# Altium PCB I3_PFE_FULLFILL_SATTLER_RASP_2.PCBDOC
Units mm, origin at the board's own origin, x right, y up, seen from the top; angles counter-clockwise.
Board outline 41.85 x 56.55 mm, 2 copper layers (TopLayer, BottomLayer); 8 components, 6 nets, 84 pads, 11 vias.
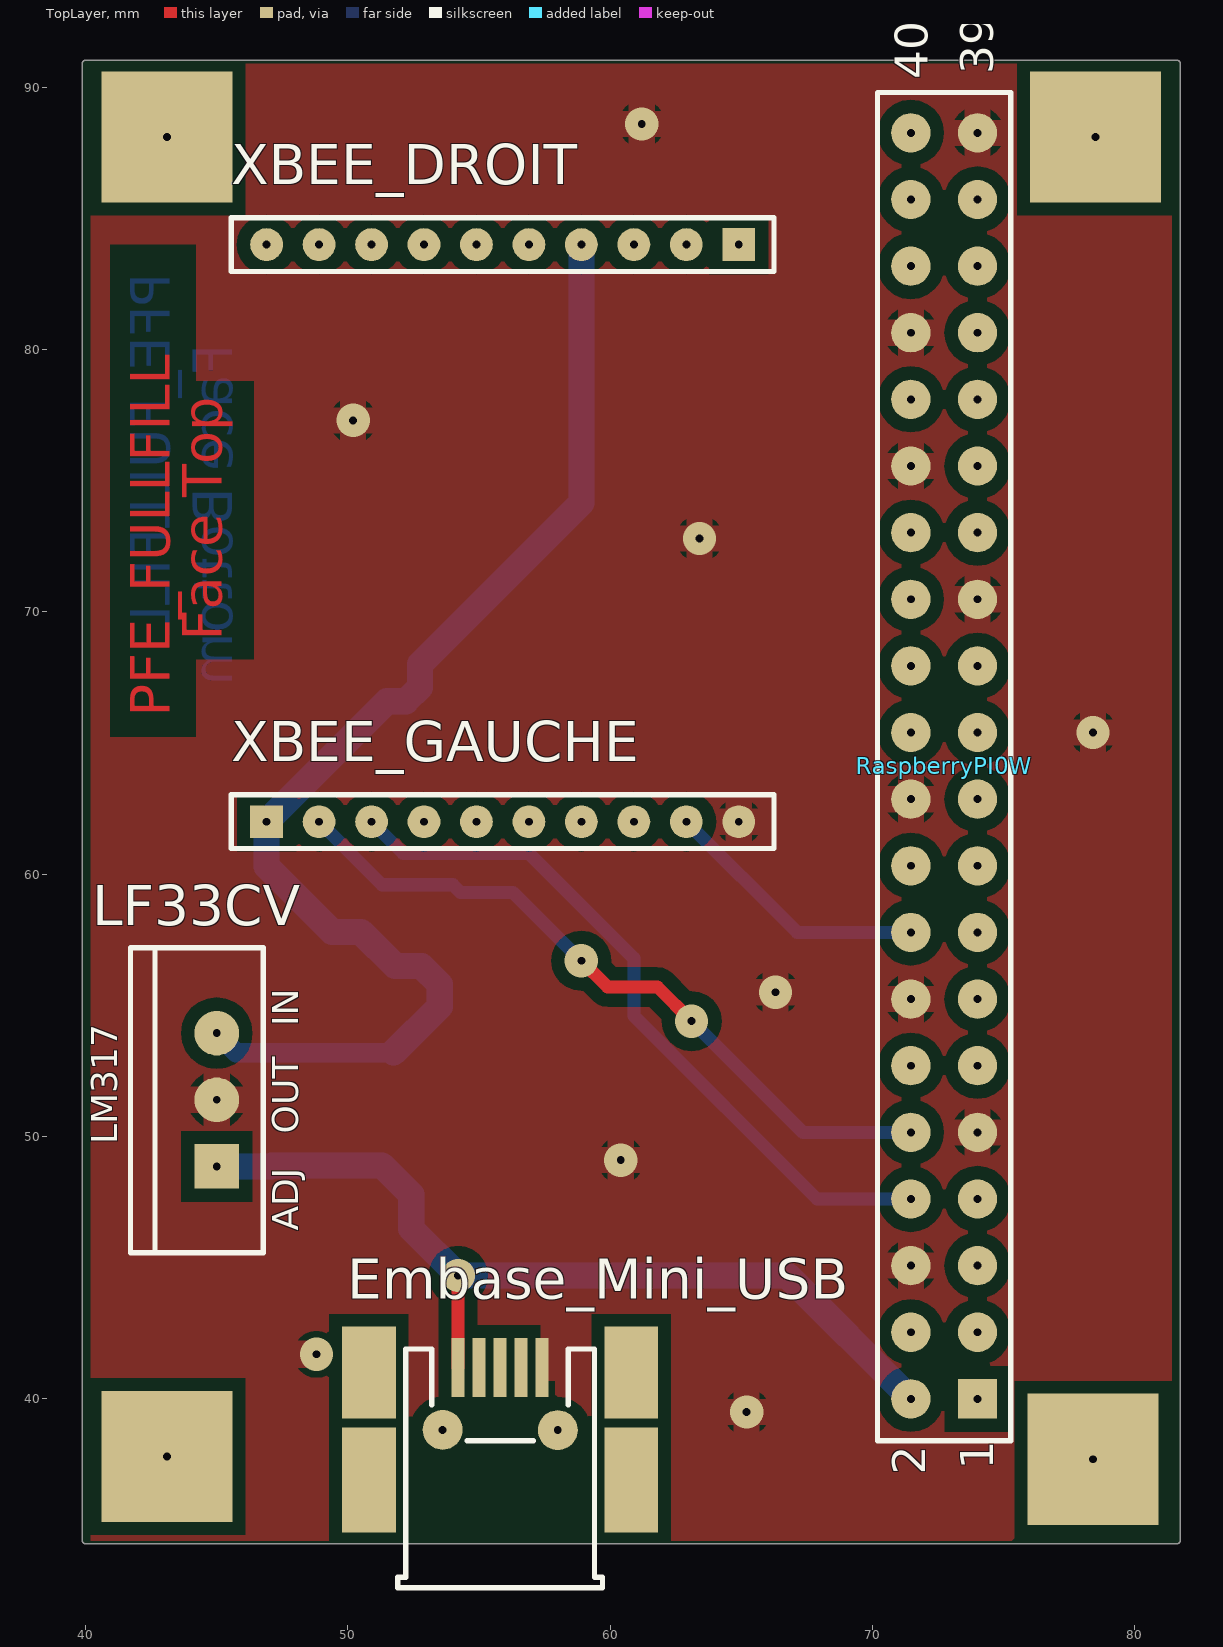
[diagram p0: TopLayer view]
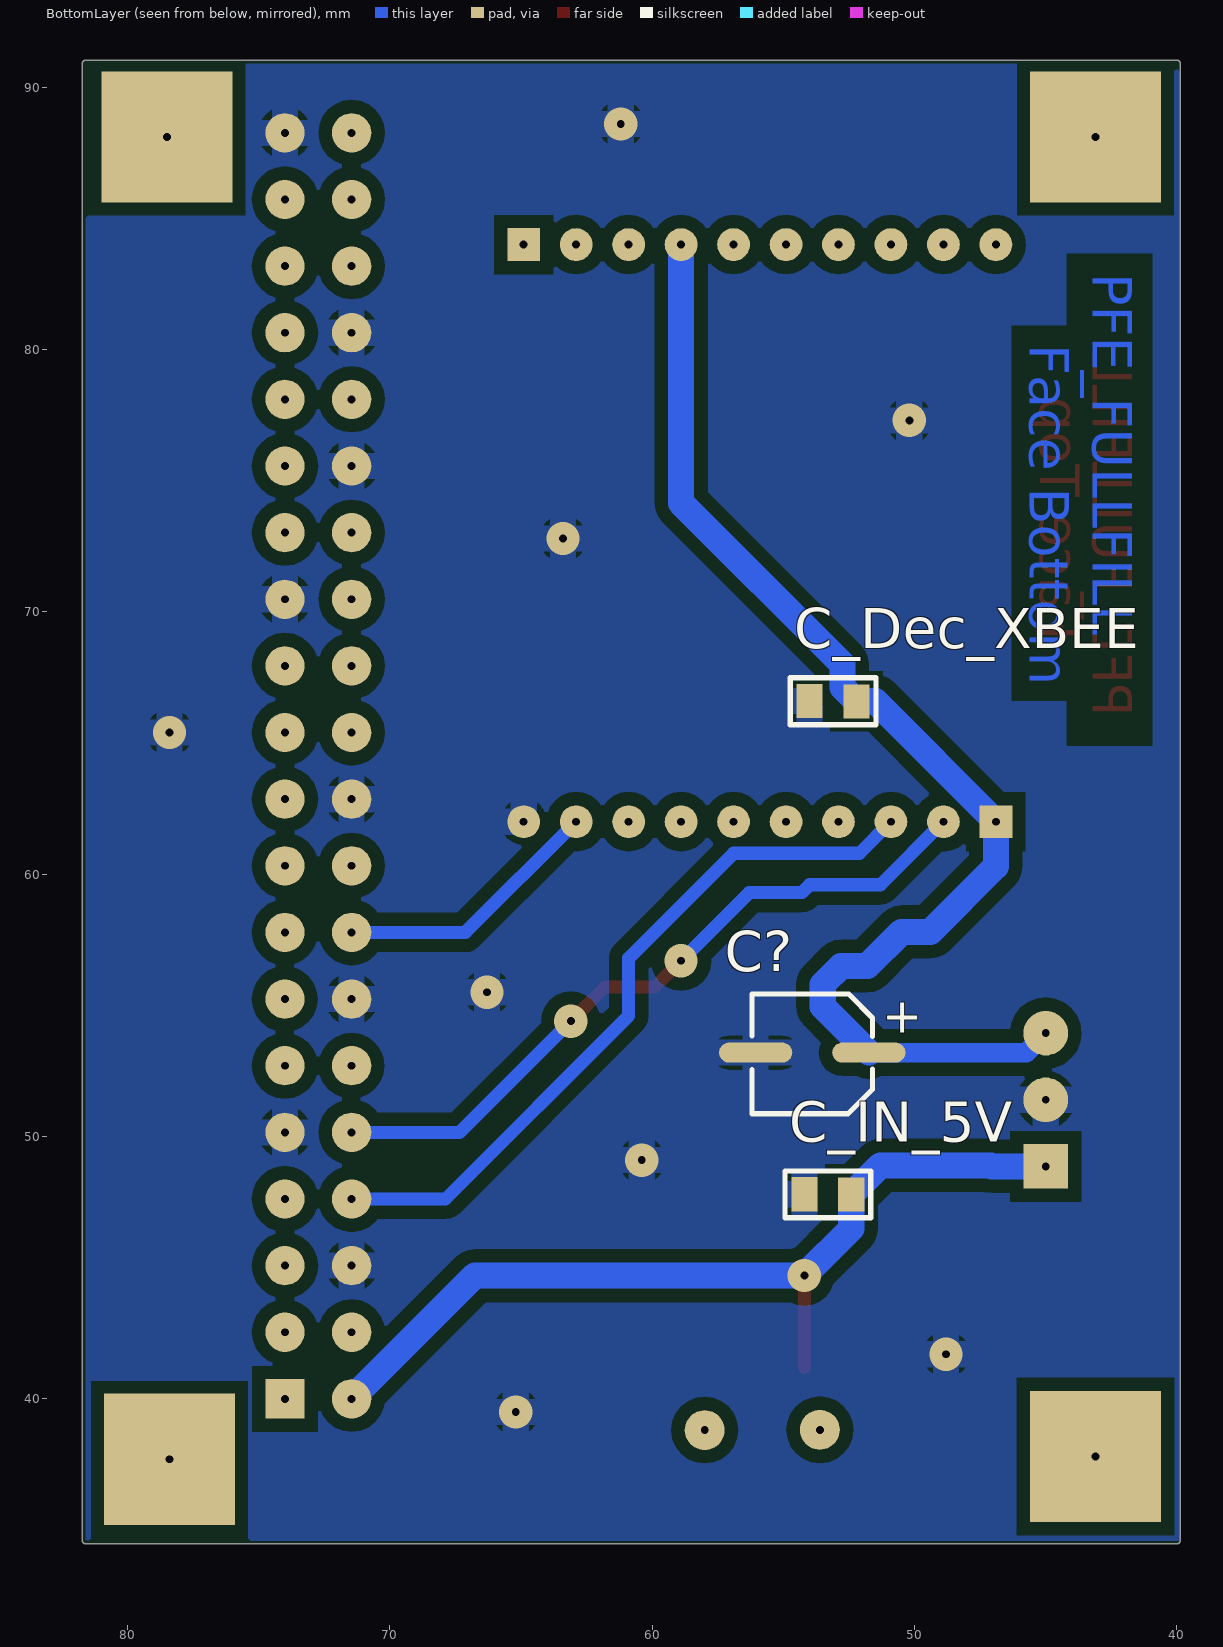
[diagram p1: BottomLayer view, seen from below]
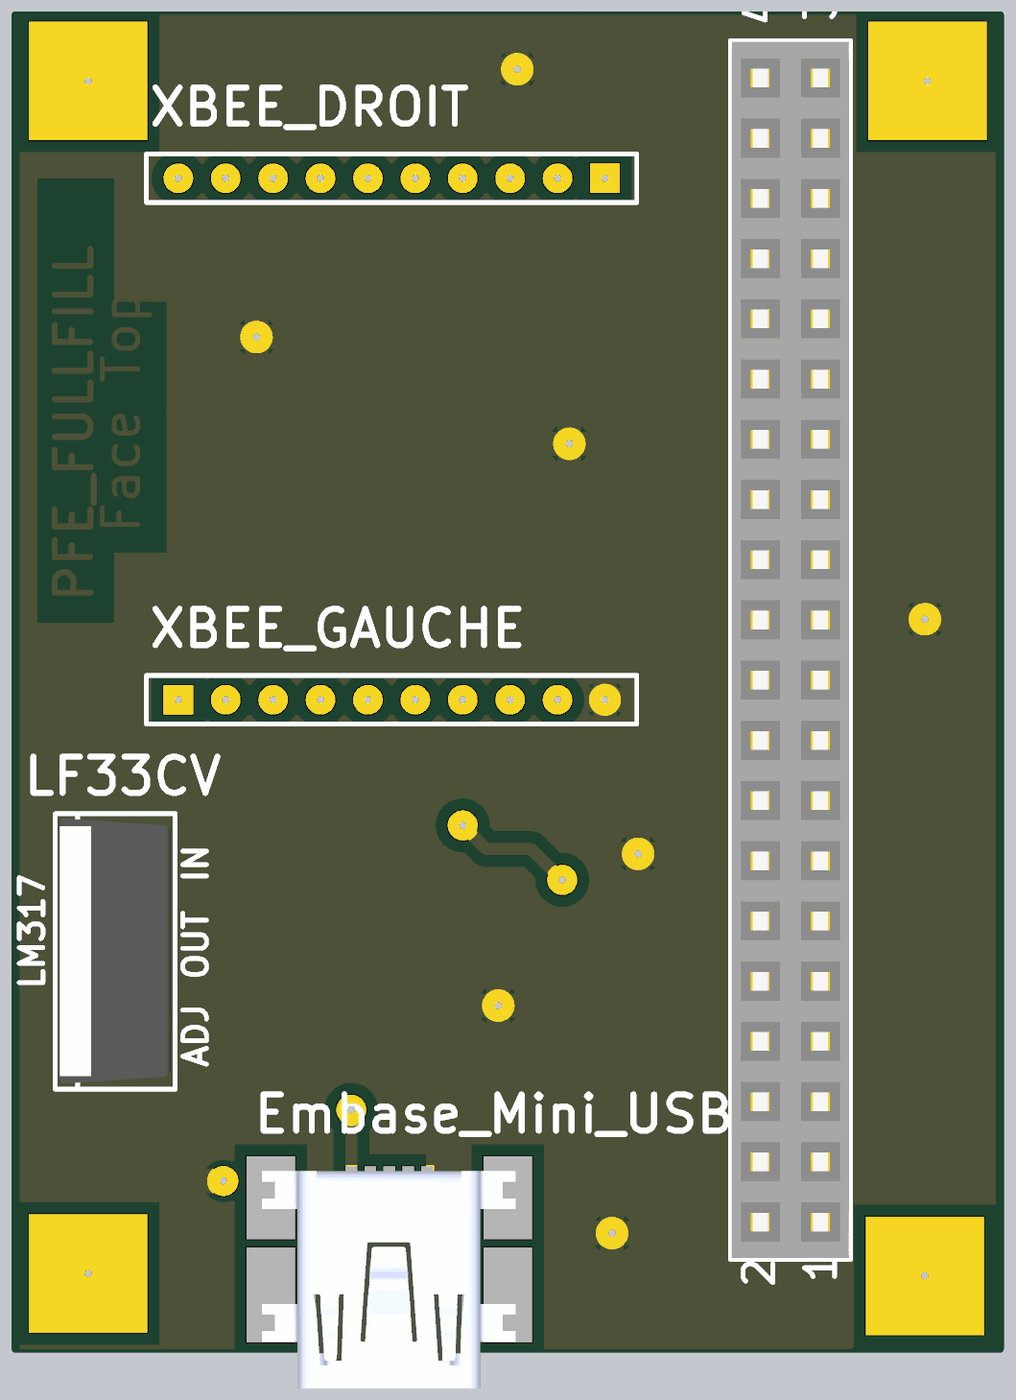
[diagram p2: 3D render of the assembled board from above, using the file's embedded part models]
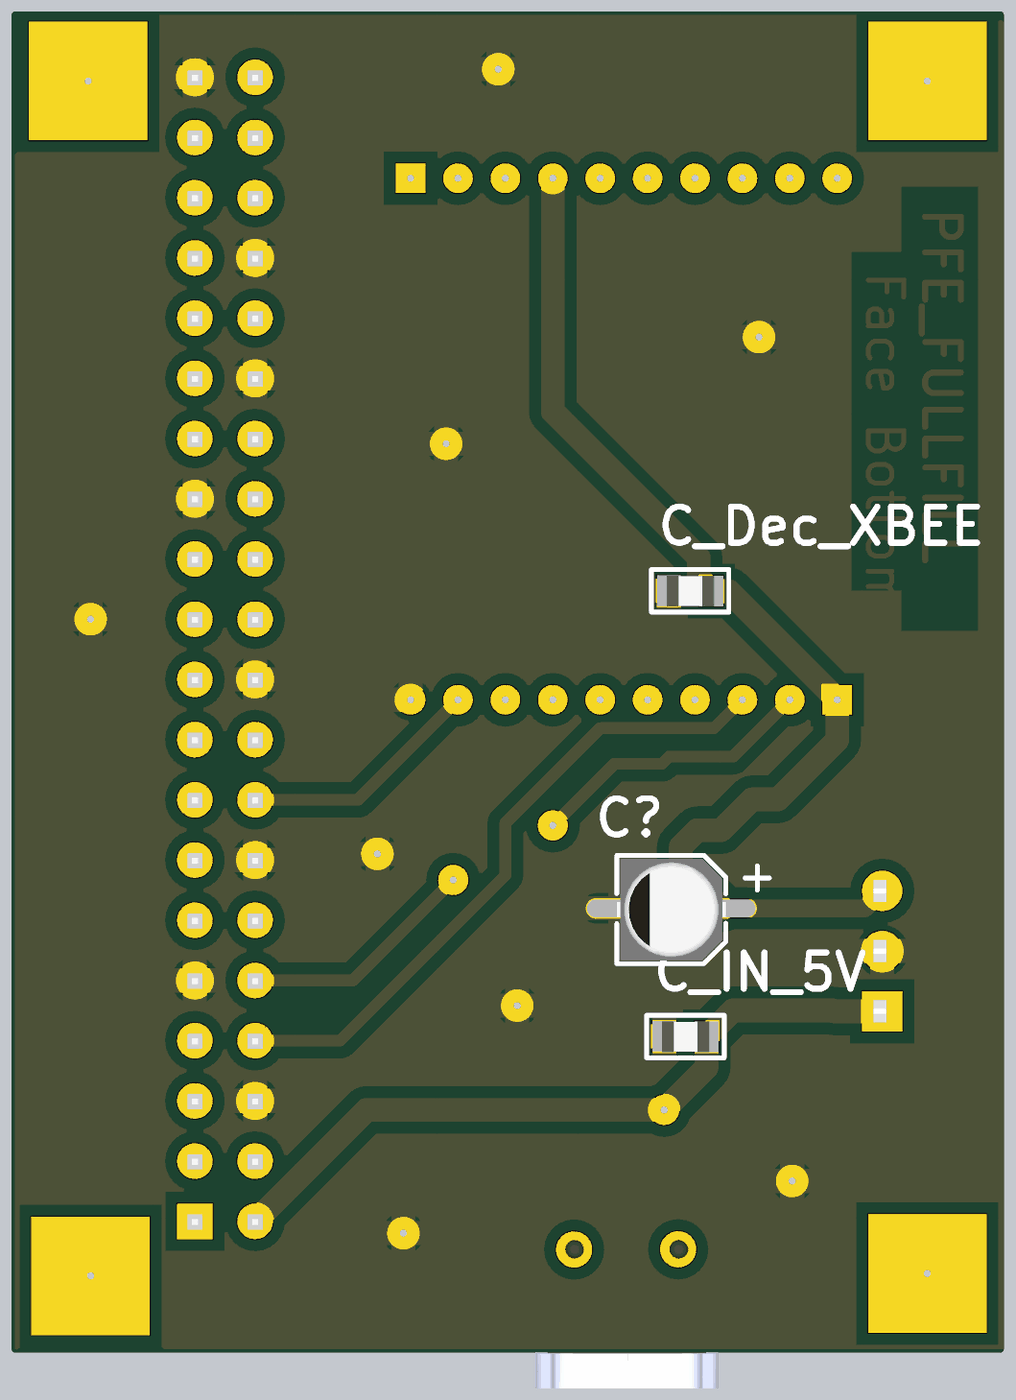
[diagram p3: 3D render of the assembled board from below, using the file's embedded part models]

## Layer stack, top to bottom
TopSolder: solder mask 0.0102, Solder Resist, Dk 3.5
TopLayer: signal copper 0.0356
Dielectric1: core 0.32, FR-4, Dk 4.8
BottomLayer: signal copper 0.0356
BottomSolder: solder mask 0.0102, Solder Resist, Dk 3.5

## Board outline
40,34.473 cw(c40,34.6) 39.873,34.6 39.873,90.9 cw(c40,90.9) 40,91.027 81.6,91.027 cw(c81.6,90.9) 81.727,90.9 81.727,34.6 cw(c81.6,34.6) 81.6,34.473

## Design rules (kind name [scope] priority, off if disabled: settings)
Clearance Clearance_9 [InNamedPolygon('GND-Top') Or  InNamedPolygon('GND-Bottom')] p1: gap=0.5
Clearance Clearance_8 [InNamedPolygon('GND-Bottom')] p2: gap=0.5
Clearance Clearance_7 [InNamedPolygon('GND-Top')] p3: gap=0.5
Clearance Clearance_6 [InNamedPolygon('GND-Bottom')] p4: gap=0.5
Clearance Clearance_5 [InNamedPolygon('GND-Bottom')] p5: gap=0.5
Clearance Clearance_4 [InNamedPolygon('topGND')] p6 off: gap=0.5
Clearance Clearance_3 [InNamedPolygon('BottomGND')] p7 off: gap=0.5
Clearance Clearance_2 [InNamedPolygon('BottomGND')] p8 off: gap=0.5
Clearance Clearance_1 [InNamedPolygon('BottomGND')] p9 off: gap=0
Clearance [All] p10: gap=0.25
FabricationTestPointUsage TestPointUsage [All] p1: valid=0 allowmultiple=FALSE
FabricationTestpoint Testpoint [All] p1: side=3 testpointundercomponent=TRUE minsize=1.016 maxsize=2.54 preferedsize=1.524 minholesize=0.508 maxholesize=1.016 preferedholesize=0.813 testpointgrid=0.025 allowsidetop=TRUE allowsidebottom=TRUE usegrid=TRUE gridtolerance=0
PlaneConnect [All] p1: planeconnectstyle=Relief reliefexpansion=0.5 reliefentries=4 reliefconductorwidth=1.016 reliefairgap=0.5
PolygonConnect [All] p1: connectstyle=Relief reliefconductorwidth=1.016 reliefentries=4 polygonreliefangle="90 Angle" airgapwidth=0.254
RoutingVias [All] p1: holewidth=0.6 width=1.524 viastyle="Through Hole" minholewidth=0.6 minwidth=1.524 maxholewidth=0.6 maxwidth=1.524
ShortCircuit [All] p1: allowed=TRUE
SilkToSolderMaskClearance SilkscreenOverComponentPads [IsPad] p1: minsilkscreentomaskgap=0.254 clearancetoexposedcopper=TRUE
SolderMaskExpansion [All] p1: expansion=0.051
Width Width_Power [(InNet('GND') OR InNet('+5V')  OR InNet('+3V3') OR InNet('VCC'))] p1: maxlimit=3 minlimit=0.3 preferedwidth=1.5
Width [All] p2: maxlimit=3 minlimit=0.03 preferedwidth=0.5
24 further rules are at their usual default settings.

## Components (designator, comment, footprint, x,y, rotation, side; value= is the part's Value field where it differs from the comment)
C? "CMS_POLARISE_ELECTROLYTIQUE_B" CONDENSATEUR_CMS_POLARISE_ELECTROLYTIQUE_B/4343 53.9,53.2 r180 bottom
C_Dec_XBEE "CMS_0805" CONDENSATEUR_CMS_0805 54,66.6 r180 bottom
C_IN_5V "CMS_0805" CONDENSATEUR_CMS_0805 54.2,47.8 r180 bottom
Embase_Mini_USB "USB_B_CMS" USB_MINI_B 54.2,41.2 r0 top
LF33CV "REGULATEUR_TO220_LM317" REGULATEUR_TO220_LM317 45,51.4 r90 top
RaspberryPI0W "BARRETTE_20 CONTACTS_2 RANGEES_FEMELLE_DROITE" BARRETTE_20X2_F_D 74,40 r90 top
XBEE_DROIT "MMS-110-01-L-SV" SMTC-MMS-110-01-X-SV 64.9,84 r180 top
XBEE_GAUCHE "MMS-110-01-L-SV" SMTC-MMS-110-01-X-SV 46.9,62 r0 top

## Footprints (in the part's own frame and the unit in brackets; to place one, negate y for a bottom-side part, rotate by r counter-clockwise, add the part's x,y. Pads: shape width x height; smd on the part's side, far side on the other; paste and mask are expansions set on the pad)
BARRETTE_20X2_F_D [mm] "BARRETTE 20 CONTACTS ; 2 RANGEES ; DROITE ; FEMELLE ; ESPACEMENT BROCHES = 2.54 mm"
  rect 1.5x1.5 hole 0.3: 1(0,0)
  round 1.5 hole 0.3: 2(0,2.54) 3(2.54,0) 4(2.54,2.54) 5(5.08,0) 6(5.08,2.54) 7(7.62,0) 8(7.62,2.54) 9(10.16,0) 10(10.16,2.54) 11(12.7,0) 12(12.7,2.54) 13(15.24,0) 14(15.24,2.54) 15(17.78,0) 16(17.78,2.54) 17(20.32,0) 18(20.32,2.54) 19(22.86,0) 20(22.86,2.54) 21(25.4,0) 22(25.4,2.54) 23(27.94,0) 24(27.94,2.54) 25(30.48,0) 26(30.48,2.54) 27(33.02,0) 28(33.02,2.54) 29(35.56,0) 30(35.56,2.54) 31(38.1,0) 32(38.1,2.54) 33(40.64,0) 34(40.64,2.54) 35(43.18,0) 36(43.18,2.54) 37(45.72,0) 38(45.72,2.54) 39(48.26,0) 40(48.26,2.54)
  silkscreen extent -1.6,-1.27 49.8,3.81, body extent -1.55,-1.2 49.75,3.75, height 8.5
CONDENSATEUR_CMS_0805 [mm] "CONDENSATEUR CMS 0805 ; DIMENSIONS : 2mm x 1.25mm"
  rect 1x1.3 smd: 1(0,0) 2(1.79,-0.01)
  silkscreen extent -0.74,-0.9 2.53,0.89, body extent -0.09,-0.67 1.91,0.64, height 0.73
CONDENSATEUR_CMS_POLARISE_ELECTROLYTIQUE_B/4343 [mil] "CONDENSATEUR CMS POLARISE ELECTROLYTIQUE B : 4.3mm x 4.3mm ; DIAMETRE : 4mm ; ESPACEMENT BROCHES : 4.3mm"
  oval 110x30 smd: 1(85,0) 2(-85,0)
  silkscreen extent -91,-92 91,88, body extent -91,-87 91,83, height 213
REGULATEUR_TO220_LM317 [mm] "BOITIER TO220 ; DIMENSIONS : 11.2mm x 4.7mm ; ESPACEMENT BROCHES : 2.54 mm"
  rect 1.7x1.7 hole 0.3: 1(-2.54,0)
  round 1.7 hole 0.3: 2(0,0) 3(2.54,0)
  silkscreen extent -5.83,-1.77 5.8,3.29, body extent -5.61,-1.59 5.61,3.1, height 19.33
SMTC-MMS-110-01-X-SV [mm] "Through Hole Box Connector Strip Assembly, 1x10 Pins, Vertical, 2mm Pitch, Female"
  rect 1.25x1.25 hole 0.3: 1(0,0)
  round 1.25 hole 0.3: 2(2,0) 3(4,0) 4(6,0) 5(8,0) 6(10,0) 7(12,0) 8(14,0) 9(16,0) 10(18,0)
  silkscreen extent -1.35,-1.02 19.35,1.02, body extent -1.28,-1 19.28,1, height 4.44
USB_MINI_B [mm] "USB ; CMS ; TYPE B ; PAS = 0.8 mm"
  rect 0.5x2.25 smd: 1(0,0) 2(0.8,0) 3(1.6,0) 4(2.4,0) 5(3.2,0)
  rect 2.05x3.5 smd: 6(6.6,-0.2) 9(-3.4,-0.2)
  rect 2.05x4 smd: 7(6.6,-4.3) 8(-3.4,-4.3)
  round 1.524 hole 0.3: -(-0.59,-2.38) -(3.8,-2.39)
  silkscreen extent -2.3,-8.4 5.5,0.7, body extent -3.77,-8.28 6.93,0.92, height 0.6

## Part data
C?: library part CONDENSATEUR_CMS_POL_ELECTROLY_B_4343, "CONDENSATEUR CMS POLARISE ELECTROLYTIQUE BOITIER B/4343"
C_Dec_XBEE C_IN_5V: library part CONDENSATEUR_CMS_CER_0805, "CONDENSATEUR CMS CERAMIQUE 0805"
Embase_Mini_USB: "EMBASE USB CMS TYPE B"
LF33CV: "REGULATEUR  DE TENSION DE SORTIE AJUSTABLE BOITIER TO220"
XBEE_DROIT XBEE_GAUCHE: "Tiger Claw(TM) Socket Strip, Through-hole, Vertical, -55 to 125 degC, 2 mm Pitch, 10-Pin, Female, RoHS"

## Free pads (board coordinates)
  rect 5x5 hole 0.3: 1(43.1,88.1) 2(43.1,37.8) 3(78.4,37.7) 4(78.5,88.1)

## Via types
v1: diameter 1.27, hole 0.3, TopLayer to BottomLayer, 11 vias

## Nets (pads, with @x,y where several pads share a name; then routed paths per layer and width w, separated by ;. In a path a pad name is that pad's centre, name@x,y a point inside that pad or via, vN(x,y) a via of type N, cw(c..) or ccw(c..) an arc to the next point about the centre after c; other vN are vias at no path point)
3.3V: C?.1 C_Dec_XBEE.2 LF33CV.3 XBEE_DROIT.4 XBEE_GAUCHE.1 | length 47.9
  BottomLayer w0.75: LF33CV.3 45.74,53.2 C?.1@51.7,53.2
  BottomLayer w1: C?.1 53.5,54.959 53.5,55.8 52.8,56.5 51.8,56.5 50.5,57.8 49.4,57.8 46.9,60.3 XBEE_GAUCHE.1 51.49,66.59 C_Dec_XBEE.2 52.75,67.13 52.75,68 58.9,74.15 XBEE_DROIT.4
5V: C_IN_5V.2 Embase_Mini_USB.1 LF33CV.1 RaspberryPI0W.2 | length 34.4
  TopLayer w0.5: Embase_Mini_USB.1 v1(54.2,44.7)
  BottomLayer w1: LF33CV.1 47.06,48.86 47.1,48.9 51.3,48.9 C_IN_5V.2 52.41,46.49 v1(54.2,44.7) 66.76,44.7 RaspberryPI0W.2
GND: C?.2 C_Dec_XBEE.1 C_IN_5V.1 Embase_Mini_USB.5 LF33CV.2 RaspberryPI0W.6 RaspberryPI0W.9 RaspberryPI0W.14 RaspberryPI0W.20 RaspberryPI0W.25 RaspberryPI0W.30 RaspberryPI0W.34 RaspberryPI0W.39 XBEE_GAUCHE.10
  other v1: 65.2,39.5 48.8,41.7 60.4,49.1 66.3,55.5 78.4,65.4 63.4,72.8 50.2,77.3 61.2,88.6
UART_XBEE_RX: RaspberryPI0W.8 XBEE_GAUCHE.3 | length 27.8
  BottomLayer w0.5: XBEE_GAUCHE.3 52.1,60.8 56.9,60.8 60.9,56.8 60.9,54.6 67.88,47.62 RaspberryPI0W.8
UART_XBEE_TX: RaspberryPI0W.10 XBEE_GAUCHE.2 | length 27.5
  TopLayer w0.5: v1(58.9,56.7) 59.9,55.7 61.8,55.7 v1(63.1,54.4)
  BottomLayer w0.5: XBEE_GAUCHE.2 51.3,59.6 54,59.6 54.3,59.3 56.3,59.3 v1(58.9,56.7) ; v1(63.1,54.4) 67.34,50.16 RaspberryPI0W.10
XBEE_SLEEP_RQ: RaspberryPI0W.16 XBEE_GAUCHE.9 | length 10.3
  BottomLayer w0.5: XBEE_GAUCHE.9 67.12,57.78 RaspberryPI0W.16
pads on no net: Embase_Mini_USB.2 Embase_Mini_USB.3 Embase_Mini_USB.4 Embase_Mini_USB.6 Embase_Mini_USB.7 Embase_Mini_USB.8 Embase_Mini_USB.9 Embase_Mini_USB.- RaspberryPI0W.1 RaspberryPI0W.3 RaspberryPI0W.4 RaspberryPI0W.5 RaspberryPI0W.7 RaspberryPI0W.11 RaspberryPI0W.12 RaspberryPI0W.13 RaspberryPI0W.15 RaspberryPI0W.17 RaspberryPI0W.18 RaspberryPI0W.19 RaspberryPI0W.21 RaspberryPI0W.22 RaspberryPI0W.23 RaspberryPI0W.24 RaspberryPI0W.26 RaspberryPI0W.27 RaspberryPI0W.28 RaspberryPI0W.29 RaspberryPI0W.31 RaspberryPI0W.32 RaspberryPI0W.33 RaspberryPI0W.35 RaspberryPI0W.36 RaspberryPI0W.37 RaspberryPI0W.38 RaspberryPI0W.40 XBEE_DROIT.1 XBEE_DROIT.2 XBEE_DROIT.3 XBEE_DROIT.5 XBEE_DROIT.6 XBEE_DROIT.7 XBEE_DROIT.8 XBEE_DROIT.9 XBEE_DROIT.10 XBEE_GAUCHE.4 XBEE_GAUCHE.5 XBEE_GAUCHE.6 XBEE_GAUCHE.7 XBEE_GAUCHE.8

## Polygon pours and split planes (outlines as drawn)
GND on BottomLayer "GND-Bottom" (solid, remove dead copper, pour order 4): 40.1,90.9 81.6,90.9 81.6,34.462 81.462,34.6 39.873,34.6 39.873,90.573 40.2,90.9
GND on TopLayer "GND-Top" (solid, remove dead copper, pour order 6): 39.983,90.683 40.2,90.9 81.4,90.9 81.4,34.695 81.506,34.589 81.495,34.6 40.2,34.6 40.2,90.8 40.1,90.9

## Other copper
TopLayer:
  text "Face Top" at 45.2,68.9 h1.5 r90
  text "PFE_FULLFILL" at 43.2,66 h1.5 r90
BottomLayer:
  text "PFE_FULLFILL" at 43.2,82.9 h1.5 r90
  text "Face Bottom" at 45.6,80.2 h1.5 r90

## Silkscreen, mask and mechanical layers (free items; w line width, h text height)
Mechanical15:
  lines w0.254: 40,34.6 81.6,34.6 81.6,90.9 40,90.9 40,34.6

## Text inside footprints (layer, text, board x,y; h text height)
C?: BottomOverlay "+" at 51.233,53.962 h1.33
LF33CV: TopOverlay "LM317" at 41.2,49.7 h1 r90; TopOverlay "IN" at 48.1,54.2 h1 r90; TopOverlay "OUT" at 48.1,50.1 h1 r90; TopOverlay "ADJ" at 48.1,46.4 h1 r90
RaspberryPI0W: TopOverlay "39" at 74.6,90.5 h1.27 r90; TopOverlay "40" at 72.1,90.3 h1.27 r90; TopOverlay "2" at 72,37.1 h1.27 r90; TopOverlay "1" at 74.6,37.3 h1.27 r90